# EAGLE board Mirrors_Panel (EAGLE 9.6.2)
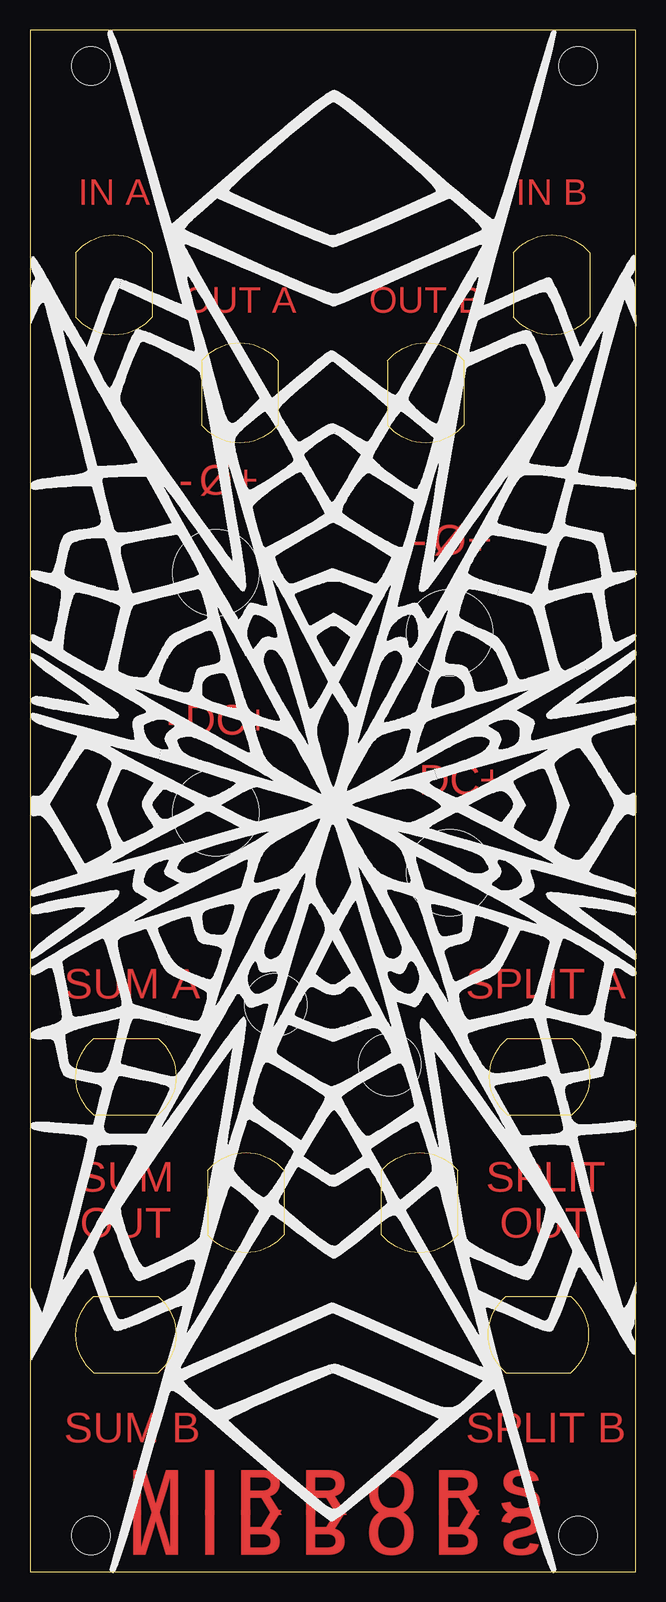
[diagram p0: board, top side]
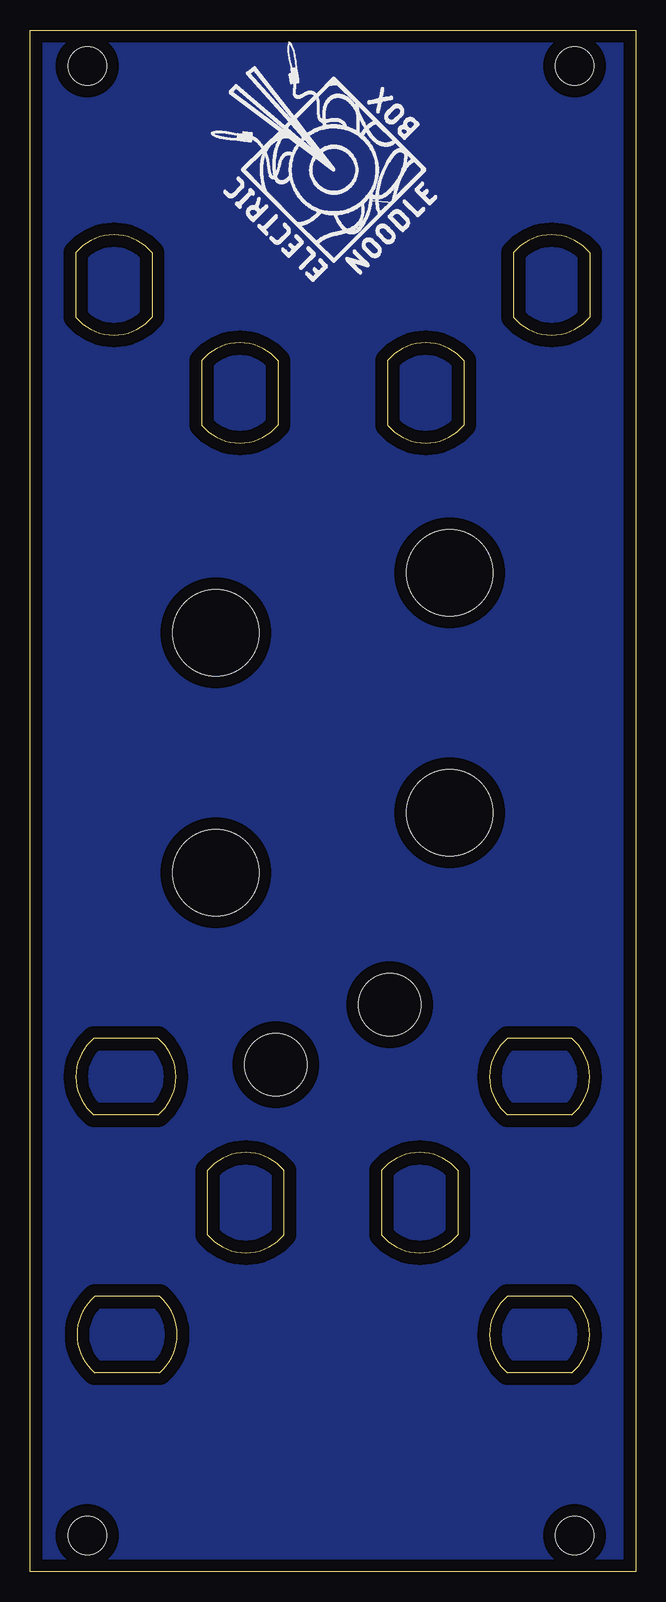
[diagram p1: board, bottom side, seen from below]

Size 50.5 x 128.5 mm. Coordinates in mm from the lower left corner, seen from the top.
Outline: 0,0 50.5,0 50.5,128.5 0,128.5 0,0
Copper layers (1*16): Top 0.035mm / dielectric 1.5mm / Bottom 0.035mm
Design rules "default": minimum track width 6mil, minimum drill 0.35mm, track to track 6mil, track to pad 6mil, pad to pad 6mil, via to via 6mil, smd to smd 6mil, copper to edge 40mil, drill to drill 6mil, minimum pad ring 10mil, minimum via ring 8mil, stop-mask expansion 4mil, vias tented up to drill 0mil, thermal gap 10mil
Holes 3.2 mm at 5.08,3 5.08,125.5 45.72,3 45.72,125.5
Holes 5.2 mm at 20.5,47.25 30,42.25

## Footprints (pad centres in the part's own frame; a part is rotated, then mirrored left to right if it is on the bottom)
ALPHA9MM_POT_CUTOUT = hole 7.2: 0,0

## Placement (x,y rotation side)
E$1  [CINCH_BANANA_CUTOUT]  7,107.25 0 top
E$2  [CINCH_BANANA_CUTOUT]  43.5,107.25 0 top
E$3  [CINCH_BANANA_CUTOUT]  17.5,98.25 0 top
E$4  [CINCH_BANANA_CUTOUT]  33,98.25 0 top
E$5  [CINCH_BANANA_CUTOUT]  8,41.25 90 top
E$6  [CINCH_BANANA_CUTOUT]  8,19.75 90 top
E$7  [CINCH_BANANA_CUTOUT]  18,30.75 0 top
E$8  [CINCH_BANANA_CUTOUT]  32.5,30.75 180 top
E$9  [CINCH_BANANA_CUTOUT]  42.5,41.25 90 top
E$10  [CINCH_BANANA_CUTOUT]  42.4,19.75 90 top
E$11  [ALPHA9MM_POT_CUTOUT]  15.5,83.25 0 top
E$12  [ALPHA9MM_POT_CUTOUT]  15.5,63.25 0 top
E$13  [ALPHA9MM_POT_CUTOUT]  35,78.25 0 top
E$14  [ALPHA9MM_POT_CUTOUT]  35,58.25 0 top
E$15  [LOGO20X20]  16,107.5 90 bottom

## Library data of the parts
E$1-E$15 = ElectricNoodleBox

## Tracks (layer width: path | path; a pad name or v marks a point on that pad's centre or on a via)
GND
  pour Bottom (rank 3): 0,0 50.5,0 50.5,128.5 0,128.5

## Text on the board
Top: IN A | IN B | OUT A | OUT B | - | Ø | + | - | Ø | + | - | DC | + | - | DC | + | SUM A | SPLIT A | SUM / OUT | SPLIT / OUT | SUM B | SPLIT B | M I R R O R S | M I R R O R S
tStop: IN A | IN B | OUT A | OUT B | - | Ø | + | - | Ø | + | S / H / A / D / O / W / S | I / M / P / R / E / S / S / I / O / N / S | - | DC | + | - | DC | + | I / L / L / U / S / I / O / N / S | SUM A | SPLIT A | SUM / OUT | SPLIT / OUT | SUM B | SPLIT B | M I R R O R S | M I R R O R S